# Altium PCB PCB_rockets_test_bench_acquisition.PcbDoc (part 2 of 2)
Units mm, origin at the board's own origin, x right, y up, seen from the top; angles counter-clockwise.
Board outline 99.82 x 99.85 mm, 4 copper layers (Top Layer, Int1 (GND), Int2 (PWR), Bottom Layer), stack 1.57 mm thick; 106 components, 96 nets, 381 pads, 73 vias.
Unrouted connection lines stored in the file: 46.
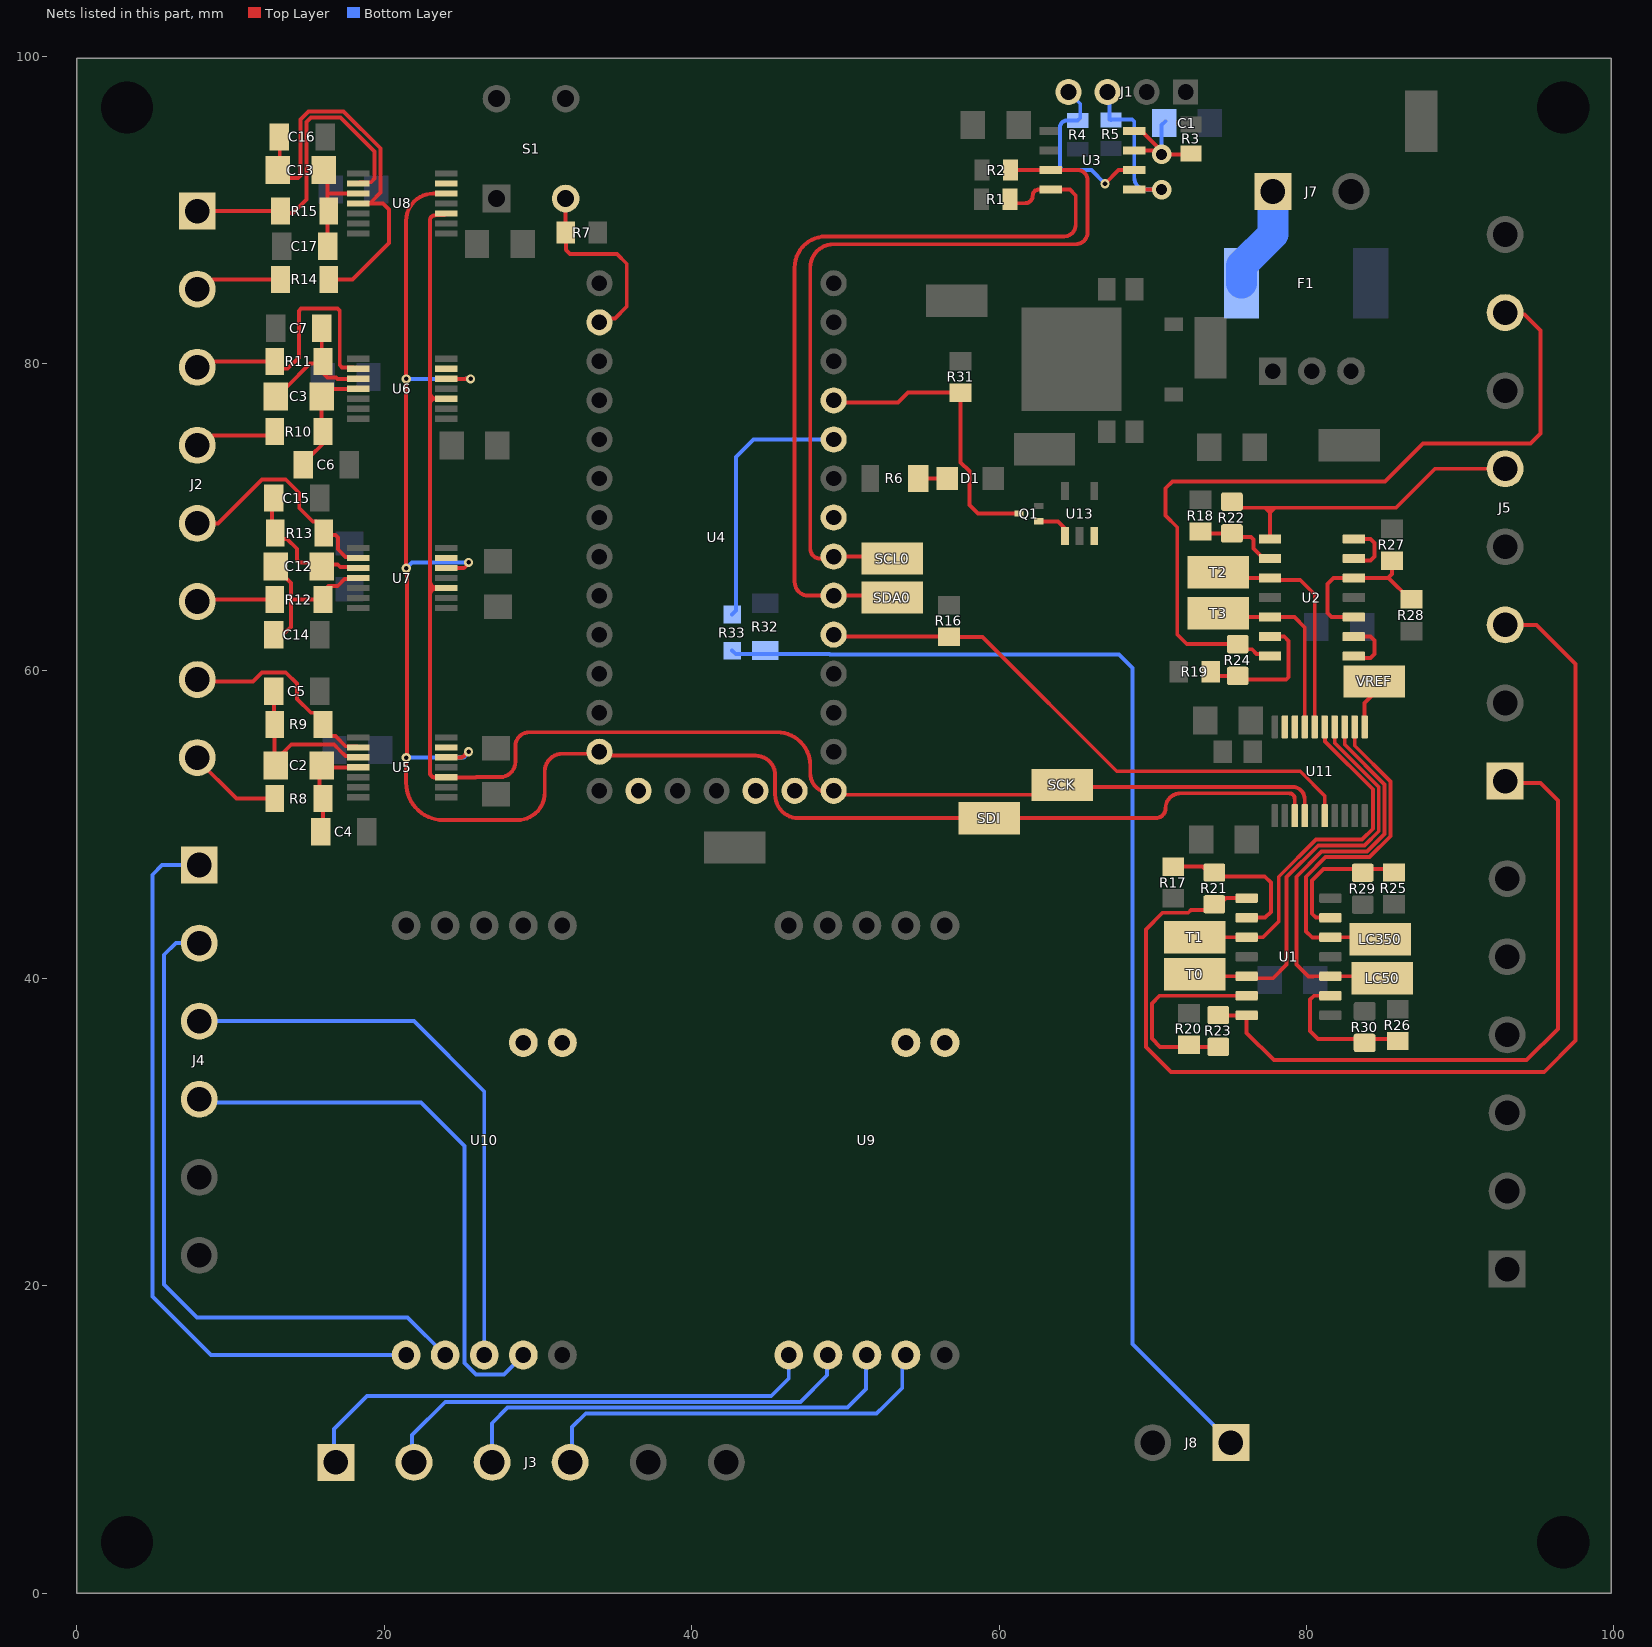
[diagram p4: the nets of this part, all layers, seen from the top]

## Via types
v1: diameter 0.6, hole 0.3, Top Layer to Bottom Layer, tented both sides, 33 vias
v2: diameter 0.6, hole 0.3, Top Layer to Bottom Layer, 16 vias
v3: diameter 0.9, hole 0.45, Top Layer to Bottom Layer, 13 vias
v4: diameter 0.9, hole 0.45, Top Layer to Bottom Layer, tented both sides, 7 vias
v5: diameter 1.27, hole 0.711, Top Layer to Bottom Layer, 4 vias

## Nets (pads, with @x,y where several pads share a name; then routed paths per layer and width w, separated by ;. In a path a pad name is that pad's centre, name@x,y a point inside that pad or via, vN(x,y) a via of type N, cw(c..) or ccw(c..) an arc to the next point about the centre after c; other vN are vias at no path point) (continued)
MOSI: SDI.1 U4.11 U5.12 U6.12 U7.12 U8.12 U11.13 | length 140.1
  Top Layer w0.254: U7.12@23.923,66.705 25.146,66.705 ; U5.12@24.034,54.371 24.956,54.371 ccw(c24.956,54.734) v2@25.319,54.734 ; U6.12@24.034,79.009 24.034,78.994 25.214,78.994 ; U8.12@24.034,91.059 23.201,91.059 ccw(c23.201,89.281) 21.423,89.281 v1(21.423,78.994) v1(21.423,66.675) 21.469,66.629 21.469,54.402 v1(21.423,54.356) 21.423,52.715 ; 24.956,54.371 ccw(c24.956,54.734) v2@25.319,54.734 ; 25.233,66.721 cw(c25.146,66.96) 25.146,66.706 ; v2(25.487,54.737) 25.322,54.737 v2@25.319,54.734 ; v2(25.487,67.056) 25.487,66.975 25.233,66.721 cw(c25.146,66.96) 25.146,66.706 ; v2(25.614,78.994) 25.406,78.994 v2@25.36,79.04 ; U11.13@79.234,50.582 79.234,51.667 ccw(c78.861,51.667) 78.861,52.04 71.812,52.04 ccw(c71.812,51.054) 70.826,51.054 ; 21.423,52.715 ccw(c23.846,52.715) 23.846,50.292 ; 21.423,52.715 ccw(c23.846,52.715) 23.846,50.292 ; 23.846,50.292 28.648,50.292 ; 25.214,78.994 ccw(c25.214,79.248) v2@25.36,79.04 ; 25.214,78.994 ccw(c25.214,79.248) v2@25.36,79.04 ; 28.648,50.292 ccw(c28.648,52.084) 30.44,52.084 ; 28.648,50.292 ccw(c28.648,52.084) 30.44,52.084 ; 30.44,52.084 30.44,53.467 ; 30.44,53.467 cw(c31.583,53.467) 31.583,54.61 ; 30.44,53.467 cw(c31.583,53.467) 31.583,54.61 ; 31.583,54.61 33.996,54.61 34.123,54.483 44.156,54.483 ; 44.156,54.483 cw(c44.156,53.213) 45.426,53.213 ; 44.156,54.483 cw(c44.156,53.213) 45.426,53.213 ; 45.426,51.943 ccw(c46.95,51.943) 46.95,50.419 ; 45.426,51.943 ccw(c46.95,51.943) 46.95,50.419 ; 45.426,51.943 45.426,53.213 ; 46.95,50.419 70.191,50.419 ; 70.191,50.419 ccw(c70.191,51.054) 70.826,51.054 ; 70.191,50.419 ccw(c70.191,51.054) 70.826,51.054
  Bottom Layer w0.254: v1(21.423,54.356) 25.065,54.356 ccw(c25.065,54.61) 25.319,54.61 25.446,54.737 v2(25.487,54.737) ; v1(21.423,78.994) v2@25.314,78.994 ; v2(25.487,67.056) 21.804,67.056 v1@21.469,66.721 ; v2(25.614,78.994) 25.406,78.994 v2@25.36,79.04 ; v1@21.469,66.721 ccw(c21.469,66.675) v1(21.423,66.675) cw(c21.469,66.675) v1@21.469,66.721 ; v2@25.314,78.994 ccw(c25.314,79.04) v2@25.36,79.04 ; v2@25.314,78.994 ccw(c25.314,79.04) v2@25.36,79.04
MSCK: SCK.1 U4.13 U5.10 U6.10 U7.10 U8.10 U11.14 | length 117.8
  Top Layer w0.254: 22.967,88.923 cw(c22.713,88.922) 22.967,88.92 ; 23.201,77.704 23.201,77.709 ; U8.10@23.819,89.641 ccw(c23.819,89.895) U8.10@24.034,89.759 ; U8.10@23.819,89.641 23.314,89.641 ccw(c23.314,89.293) 22.967,89.294 22.967,88.924 cw(c22.713,88.922) 22.967,88.92 ; U7.10@24.034,65.39 U7.10@23.432,65.39 ; U6.10@24.034,77.709 U6.10@23.363,77.709 ; 45.553,56.007 29.424,56.007 ; U11.14@79.884,50.582 79.884,51.648 ; 22.967,64.925 cw(c23.432,64.925) U7.10@23.432,65.39 ; 22.967,64.925 cw(c23.432,64.925) 22.967,64.928 cw(c23.432,64.925) U7.10@23.429,65.39 ; 22.967,64.924 22.967,65.431 ; 22.967,64.924 22.967,53.393 ccw(c23.289,53.393) 23.289,53.071 U5.10@24.034,53.071 25.911,53.071 ccw(c25.911,53.325) 25.994,53.085 cw(c26.101,52.776) 26.101,53.103 27.519,53.103 27.679,53.103 ccw(c27.679,53.357) 27.731,53.108 ccw(c27.519,54.102) 28.535,54.102 28.535,55.118 ; 22.967,65.431 22.967,65.855 ; 22.967,65.431 23.008,65.39 U7.10@23.432,65.39 ; 22.967,65.855 ccw(c23.433,65.855) U7.10@23.432,65.39 ; 22.967,65.855 ccw(c23.433,65.855) 22.967,65.852 ccw(c23.433,65.855) 23.351,65.397 ccw(c23.433,65.855) U7.10@23.429,65.39 ; 22.967,65.855 22.967,77.343 ; 22.967,77.343 cw(c23.333,77.343) U6.10@23.333,77.709 ; 22.967,77.343 cw(c23.333,77.343) 22.967,77.346 cw(c23.333,77.343) U6.10@23.333,77.709 ; 22.967,77.343 22.967,77.724 ; 22.967,77.724 22.967,78.105 ; 22.967,77.724 22.982,77.709 23.201,77.709 ; 22.967,78.105 ccw(c23.363,78.105) U6.10@23.363,77.709 ; 22.967,78.105 ccw(c23.363,78.105) 22.967,78.102 ccw(c23.363,78.105) 23.36,77.709 ccw(c23.363,78.105) U6.10@23.363,77.709 ; 22.967,78.105 22.967,88.92 ; 23.201,77.709 cw(c23.206,77.47) 23.206,77.709 ; 23.201,77.709 cw(c23.206,77.47) 23.206,77.709 ; 23.206,77.709 U6.10@23.333,77.709 ; U6.10@23.333,77.709 U6.10@23.363,77.709 ; U7.10@23.429,65.39 ccw(c23.433,65.855) U7.10@23.432,65.39 ; U7.10@23.429,65.39 cw(c23.432,64.925) U7.10@23.432,65.39 ; 28.535,55.118 cw(c29.424,55.118) 29.424,56.007 ; 28.535,55.118 cw(c29.424,55.118) 29.424,56.007 ; 47.712,53.34 ccw(c48.982,53.34) U4.13@48.982,52.07 ; 47.712,53.34 ccw(c48.982,53.34) U4.13@48.982,52.07 ; 47.712,53.34 47.712,53.848 ; 47.712,53.848 ccw(c45.553,53.848) 45.553,56.007 cw(c45.553,53.848) 47.712,53.848 ; U4.13@48.982,52.07 U4.13@49.236,52.07 ; U4.13@49.236,52.07 ccw(c49.363,52.07) U4.13@49.363,51.943 ; U4.13@49.236,52.07 ccw(c49.363,52.07) U4.13@49.363,51.943 ; U4.13@49.363,51.943 SCK.1@63.46,51.943 ; SCK.1@63.46,51.943 ccw(c63.46,52.578) SCK.1@64.095,52.578 ; SCK.1@63.46,51.943 ccw(c63.46,52.578) SCK.1@64.095,52.578 ; SCK.1@64.095,52.578 ccw(c64.222,52.578) SCK.1@64.222,52.451 ; SCK.1@64.095,52.578 ccw(c64.222,52.578) SCK.1@64.222,52.451 ; SCK.1@64.222,52.451 79.081,52.451 ; 79.081,52.451 cw(c79.081,51.648) 79.884,51.648 ; 79.081,52.451 cw(c79.081,51.648) 79.884,51.648
NetC1_2: C1.2 R3.1 U3.7 U3.8 | length 8.6
  Top Layer w0.254: U3.7@68.794,93.853 v5@70.528,93.853 ; U3.8@68.794,95.123 69.258,95.123 v5@70.528,93.853 ; R3.1@72.477,93.675 72.299,93.853 72.045,93.599 v5(70.572,93.599) 70.572,93.809 v5@70.528,93.853
  Bottom Layer w0.254: v5(70.572,93.599) 70.572,95.504 C1.2@70.826,95.758
NetC2_1: C2.1 C4.2 R8.2 U5.4 | length 6.8
  Top Layer w0.254: C4.2@15.864,49.911 16.013,50.06 16.013,51.943 15.797,52.159 15.797,53.975 16.051,53.721 U5.4@18.304,53.721
NetC2_2: C2.2 C5.1 R9.2 U5.3 | length 10.8
  Top Layer w0.254: C5.1@12.816,58.674 12.816,56.562 R9.2@12.863,56.515 12.863,54.128 13.947,55.212 14.867,55.212 16.727,55.212 17.104,54.835 17.104,54.826 17.481,54.449 18.226,54.449 U5.3@18.304,54.371
NetC3_1: C3.1 C6.2 R10.2 U6.4 | length 7.7
  Top Layer w0.254: C6.2@14.692,73.025 15.205,73.538 15.205,73.969 16.013,74.777 16.013,75.057 15.924,75.146 C3.1@15.924,77.331 ; C3.1@15.924,77.47 16.32,77.866 16.32,78.336 18.027,78.336 U6.4@18.05,78.359
NetC3_2: C3.2 C7.1 R11.2 U6.3 | length 8.4
  Top Layer w0.254: C3.2@12.952,77.47 13.62,78.138 13.62,78.43 15.176,79.986 15.862,79.986 R11.2@16.013,80.137 ; R11.2@15.933,80.137 C7.1@15.933,81.788 ; R11.2@16.013,79.375 16.3,79.088 16.854,79.088 16.948,78.994 18.289,78.994 U6.3@18.304,79.009
NetC12_1: C12.1 C14.2 R12.2 U7.4 | length 10.7
  Top Layer w0.254: C14.2@12.816,62.611 12.943,62.484 13.549,62.484 13.93,62.865 13.93,64.643 ; C12.1@12.825,66.814 13.93,65.709 13.93,64.77 13.93,64.643 ; R12.2@15.886,64.643 13.93,64.643 ; R12.2@15.886,64.77 15.886,65.05 16.364,65.528 16.974,65.528 17.413,65.967 18.104,65.967 U7.4@18.177,66.04
NetC12_2: C12.2 C15.1 R13.2 U7.3 | length 9
  Top Layer w0.254: C15.1@12.689,70.993 12.689,69.008 12.736,68.961 13.117,68.58 13.676,68.58 14.311,67.945 14.311,67.205 14.46,67.056 C12.2@15.797,67.056 ; C12.2@15.835,66.929 C12.2@15.962,66.929 ; C12.2@16.089,66.802 C12.2@15.962,66.929 ; U7.3@18.177,66.69 18.099,66.768 17.134,66.768 16.973,66.929 16.089,66.929 C12.2@15.962,66.929 ; C12.2@15.962,66.929 15.924,66.929 C12.2@15.962,66.929
NetC13_1: C13.1 C16.2 R14.2 U8.4 | length 26.4
  Top Layer w0.254: C16.2@13.197,93.98 13.197,92.075 13.197,91.957 13.315,92.075 14.399,92.075 14.548,92.224 14.548,95.868 15.073,96.393 17.359,96.393 19.752,94 19.752,91.112 19.127,90.487 ; R14.2@16.394,85.471 17.941,85.471 20.306,87.835 20.306,90.01 19.907,90.409 19.127,90.409 U8.4@18.46,90.409
NetC13_2: C13.2 C17.1 R15.2 U8.3 | length 6.3
  Top Layer w0.254: C13.2@16.305,91.821 16.305,91.059 ; C17.1@16.314,87.63 16.314,89.709 16.394,89.789 16.305,89.878 16.305,91.059 ; U8.3@18.304,91.059 16.305,91.059
NetD1_2: D1.2 R6.1 | length 2
  Top Layer w0.254: R6.1@54.993,72.517 D1.2@57.007,72.517
NetF1_2: F1.2 J7.1 | length 6.8
  Bottom Layer w2: F1.2@75.77,85.217 75.77,86.367 77.811,88.408 J7.1@77.811,91.186
NetJ2_1: J2.1 R15.1 U8.2 | length 21
  Top Layer w0.254: J2.1@7.834,89.916 R15.1@13.244,89.916 ; R15.1@13.244,89.789 14.057,89.789 14.946,90.678 14.946,91.521 14.929,91.538 14.929,95.71 15.231,96.012 17.145,96.012 19.371,93.786 19.371,92.031 19.127,91.787 18.382,91.787 U8.2@18.304,91.709
NetJ2_2: J2.2 R14.1 | length 5.7
  Top Layer w0.254: J2.2@7.834,84.836 8.196,84.836 8.831,85.471 R14.1@13.244,85.471
NetJ2_3: J2.3 R11.1 U6.2 | length 17.2
  Top Layer w0.254: J2.3@7.834,79.756 8.159,80.081 8.774,80.081 8.831,80.137 R11.1@12.863,80.137 ; R11.1@13.141,79.653 13.7,79.653 14.438,80.391 14.438,83.417 14.587,83.566 16.956,83.566 17.105,83.417 17.105,79.886 17.254,79.737 17.972,79.737 U6.2@18.05,79.659
NetJ2_4: J2.4 R10.1 | length 5.4
  Top Layer w0.254: J2.4@7.834,74.676 8.196,74.676 8.831,75.311 12.609,75.311 R10.1@12.863,75.565
NetJ2_5: J2.5 R13.1 U7.2 | length 14.8
  Top Layer w0.254: J2.5@7.834,69.596 9.178,69.596 12.041,72.459 13.591,72.459 14.469,71.581 14.469,70.597 15.347,69.719 15.586,69.719 16.064,69.241 R13.1@16.064,68.961 ; R13.1@16.064,68.834 16.829,68.834 16.978,68.685 16.978,67.915 17.475,67.418 18.099,67.418 U7.2@18.177,67.34
NetJ2_6: J2.6 R12.1 | length 5.1
  Top Layer w0.254: J2.6@7.834,64.516 7.961,64.643 R12.1@12.863,64.643
NetJ2_7: J2.7 R9.1 U5.2 | length 13.5
  Top Layer w0.254: J2.7@7.834,59.436 7.961,59.309 11.464,59.309 12.041,59.886 13.591,59.886 14.311,59.166 14.311,58.182 15.22,57.273 15.535,57.273 16.013,56.795 R9.1@16.013,56.515 ; R9.1@16.013,56.375 16.013,56.235 16.491,55.757 16.823,55.757 17.481,55.099 18.226,55.099 U5.2@18.304,55.021
NetJ2_8: J2.8 R8.1 | length 6.2
  Top Layer w0.254: J2.8@7.834,54.356 7.834,54.229 10.374,51.689 R8.1@12.863,51.689
NetJ3_1: J3.1 U9.1 | length 34.6
  Bottom Layer w0.254: J3.1@16.724,8.509 16.724,10.668 18.883,12.827 45.172,12.827 46.315,13.97 U9.1@46.315,15.494
NetJ3_2: J3.2 U9.2 | length 31.7
  Bottom Layer w0.254: J3.2@21.804,8.509 21.804,10.287 23.963,12.446 47.077,12.446 48.804,14.173 48.804,15.443 U9.2@48.855,15.494
NetJ3_3: J3.3 U9.3 | length 30
  Bottom Layer w0.254: J3.3@27.011,8.509 27.011,11.049 28.027,12.065 50.125,12.065 51.344,13.284 51.344,15.443 U9.3@51.395,15.494
NetJ3_4: J3.4 U9.4 | length 27.1
  Bottom Layer w0.254: J3.4@32.091,8.509 32.218,8.636 32.218,10.795 33.107,11.684 52.03,11.684 52.538,12.192 53.7,13.354 53.7,15.259 U9.4@53.935,15.494
NetJ4_1: J4.1 U10.1 | length 48.8
  Bottom Layer w0.254: J4.1@7.961,47.371 5.548,47.371 4.913,46.736 4.913,19.304 8.723,15.494 U10.1@21.423,15.494
NetJ4_2: J4.2 U10.2 | length 44.2
  Bottom Layer w0.254: J4.2@7.961,42.291 6.437,42.291 5.675,41.529 5.675,20.066 7.806,17.936 21.522,17.936 U10.2@23.963,15.494
NetJ4_3: J4.3 U10.3 | length 37.6
  Bottom Layer w0.254: J4.3@7.961,37.211 21.931,37.211 26.503,32.639 U10.3@26.503,15.494
NetJ4_4: J4.4 U10.4 | length 37.3
  Bottom Layer w0.254: J4.4@7.961,32.131 8.16,31.932 22.384,31.932 25.23,29.086 25.23,14.976 25.978,14.227 27.776,14.227 U10.4@29.043,15.494
NetJ8_1: J8.1 R32.2 R33.1 | length 79.6
  Bottom Layer w0.254: R33.1@42.632,61.318 42.863,61.087 48.966,61.087 48.979,61.074 67.791,61.074 68.667,60.198 68.667,16.195 J8.1@75.074,9.787
NetLC50_1: LC50.1 U1.10 U11.3 | length 26.5
  Top Layer w0.254: U11.3@82.484,56.352 82.484,55.206 85.078,52.612 85.078,49.4 83.938,48.26 80.986,48.26 79.335,46.609 79.335,40.894 80.119,40.11 80.424,40.11 80.446,40.132 U1.10@81.552,40.132 LC50.1@83.78,40.132 ; LC50.1@84.034,40.132 LC50.1@84.796,39.37
NetLC350_1: LC350.1 U1.12 U11.2 | length 23
  Top Layer w0.254: U11.2@83.134,56.352 83.134,55.129 85.459,52.804 85.459,49.242 84.096,47.879 81.24,47.879 79.97,46.609 79.97,43.053 80.373,42.65 81.53,42.65 U1.12@81.552,42.672 84.415,42.672 LC350.1@84.542,42.545
NetQ1_2: Q1.2 U13.1 | length 2.4
  Top Layer w0.254: Q1.2@62.581,69.731 63.833,69.731 64.288,69.276 U13.1@64.288,68.764
NetR16_1: R16.1 U4.17 U11.16 | length 37.5
  Top Layer w0.254: U4.17@49.236,62.23 56.71,62.23 R16.1@56.729,62.211 58.907,62.211 67.651,53.467 79.589,53.467 81.184,51.872 U11.16@81.184,50.582
NetR17_2: R17.2 R21.1 U1.2 | length 10.3
  Top Layer w0.254: R17.2@71.461,47.263 73.244,47.263 73.879,46.628 77.284,46.628 77.684,46.228 77.684,44.323 77.303,43.942 U1.2@76.102,43.942
NetR18_2: R18.2 R22.1 U2.2 | length 5.6
  Top Layer w0.254: R18.2@73.112,69.069 73.239,68.942 R22.1@75.144,68.942 75.379,68.707 76.392,68.707 76.541,68.558 76.541,67.97 77.201,67.31 U2.2@77.626,67.31
NetR19_2: R19.2 R24.1 U2.6 | length 8.7
  Top Layer w0.254: R19.2@73.893,59.944 74.166,59.671 R24.1@75.525,59.671 ; R24.1@75.525,59.29 R24.1@75.544,59.309 ; R24.1@75.67,59.436 78.678,59.436 78.827,59.585 78.827,61.954 78.551,62.23 U2.6@77.626,62.23
NetR20_2: R20.2 R23.1 U1.6 | length 12.7
  Top Layer w0.254: R23.1@73.747,35.541 71.842,35.541 70.467,35.541 69.937,36.071 69.937,38.354 70.445,38.862 U1.6@76.102,38.862
NetR25_2: R25.2 R29.1 U1.13 | length 9.2
  Top Layer w0.254: U1.13@81.552,43.942 80.605,43.942 80.351,44.196 80.351,46.355 81.113,47.117 85.45,47.117 R25.2@85.685,46.882 R25.2@85.666,46.863
NetR26_2: R26.2 R30.1 U1.9 | length 9.5
  Top Layer w0.254: U1.9@81.552,38.862 80.478,38.862 80.224,38.608 80.224,36.576 80.751,36.049 R30.1@83.428,36.049 ; R30.1@83.526,36.049 R30.1@83.428,36.049 ; R26.2@85.939,36.049 83.78,36.049 R30.1@83.428,36.049
NetR27_1: R27.1 R28.2 U2.10 U2.12 | length 11.1
  Top Layer w0.254: U2.10@83.076,63.5 81.621,63.5 81.367,63.754 81.367,65.659 81.748,66.04 U2.12@83.076,66.04 85.304,66.04 ; R27.1@85.558,67.164 85.558,66.294 85.304,66.04 ; R28.2@86.828,64.662 86.718,64.662 85.34,66.04 85.304,66.04
NetT0_1: T0.1 U1.5 U11.4 | length 27
  Top Layer w0.254: T0.1@73.112,40.259 73.239,40.132 U1.5@76.102,40.132 76.229,40.005 77.811,40.005 78.7,40.894 78.7,46.578 80.763,48.641 83.769,48.641 84.697,49.569 84.697,52.454 81.834,55.317 U11.4@81.834,56.352
NetT1_1: T1.1 U1.3 U11.5 | length 23.8
  Top Layer w0.254: T1.1@73.112,42.545 73.239,42.672 U1.3@76.102,42.672 77.176,42.672 78.192,43.688 78.192,46.609 80.605,49.022 83.611,49.022 84.316,49.727 84.316,52.296 81.2,55.412 81.2,56.336 U11.5@81.184,56.352
NetT2_1: T2.1 U2.3 U11.6 | length 15.5
  Top Layer w0.254: T2.1@74.255,66.421 74.636,66.04 U2.3@77.626,66.04 77.753,65.913 79.589,65.913 80.534,64.968 U11.6@80.534,56.352
NetT3_1: T3.1 U2.5 U11.7 | length 12.3
  Top Layer w0.254: T3.1@74.382,63.627 74.509,63.5 U2.5@77.626,63.5 79.208,63.5 79.884,62.824 U11.7@79.884,56.352
NetU2_8: U2.8 U2.9 | length 3.8
  Top Layer w0.254: U2.8@83.076,60.96 83.203,60.833 84.161,60.833 84.415,61.087 84.415,61.976 84.161,62.23 U2.9@83.076,62.23
NetU2_13: U2.13 U2.14 | length 3.8
  Top Layer w0.254: U2.13@83.076,67.31 83.203,67.183 84.161,67.183 84.415,67.437 84.415,68.326 84.161,68.58 U2.14@83.076,68.58
NetU4_20: U4.20
NetU4_On_Off: U4.On_Off
NetU4_Program: U4.Program
NetU4_VBAT: U4.VBAT
NetU5_13: U5.13
NetU6_13: U6.13
NetU7_13: U7.13
NetU8_13: U8.13
NetU9_11: U9.11
NetU9_12: U9.12
NetU10_11: U10.11
NetU10_12: U10.12
NetU11_1: U11.1 VREF.1 | length 2.5
  Top Layer w0.254: U11.1@83.784,56.352 83.784,57.916 VREF.1@84.415,58.547
NetU11_8: U11.8
NetU11_9: U11.9
NetU13_3: U13.3
PRESSURE: R33.2 U4.22 | length 17.2
  Bottom Layer w0.254: R33.2@42.632,63.668 42.886,63.922 42.886,73.914 44.029,75.057 U4.22@49.236,75.057
PSH_BTN: R7.1 S1.3 U4.0 | length 12.7
  Top Layer w0.254: S1.3@31.801,90.73 31.801,88.536 R7.1@31.818,88.519 31.818,87.395 32.091,87.122 35.139,87.122 35.774,86.487 35.774,83.693 35.001,82.92 34.239,82.92 U4.0@33.996,82.677
SCL0_3v3: R2.1 SCL0.1 U3.3 U4.19 | length 57.8
  Top Layer w0.254: U4.19@49.236,67.31 48.347,67.31 ; U4.19@49.236,67.437 52.919,67.437 SCL0.1@53.046,67.31 ; R2.1@60.748,92.583 U3.3@63.346,92.583 65.111,92.583 ; 47.712,67.945 ccw(c48.347,67.945) 48.347,67.31 ; 47.712,67.945 ccw(c48.347,67.945) 48.347,67.31 ; 47.712,67.945 47.712,86.233 ; 47.712,86.233 cw(c49.236,86.233) 49.236,87.757 ; 47.712,86.233 cw(c49.236,86.233) 49.236,87.757 ; 49.236,87.757 64.984,87.757 ; 64.984,87.757 ccw(c64.984,88.519) 65.746,88.519 ; 64.984,87.757 ccw(c64.984,88.519) 65.746,88.519 ; 65.111,92.583 cw(c65.111,91.948) 65.746,91.948 ; 65.111,92.583 cw(c65.111,91.948) 65.746,91.948 ; 65.746,88.519 65.746,91.948
SCL0_5v: J1.04 R4.1 U3.6 | length 12.4
  Top Layer w0.254: v1(66.889,91.694) 67.778,92.583 U3.6@68.794,92.583
  Bottom Layer w0.254: J1.04@64.476,98.171 64.476,97.697 65.278,96.895 65.278,95.966 R4.1@65.111,95.799 64.388,95.799 ccw(c64.388,95.379) 63.968,95.379 63.968,92.837 ccw(c64.222,92.837) 64.222,92.583 66,92.583 v1(66.889,91.694)
SDA0_3v3: R1.1 SDA0.1 U3.4 U4.18 | length 61.8
  Top Layer w0.254: SDA0.1@53.046,64.77 52.919,64.897 U4.18@49.236,64.897 47.585,64.897 ; 46.696,65.786 ccw(c47.585,65.786) 47.585,64.897 ; 46.696,65.786 ccw(c47.585,65.786) 47.585,64.897 ; 46.696,65.786 46.696,86.233 ; 46.696,86.233 cw(c48.728,86.233) 48.728,88.265 ; 46.696,86.233 cw(c48.728,86.233) 48.728,88.265 ; 48.728,88.265 64.222,88.265 ; R1.1@60.961,90.424 cw(c60.961,90.678) R1.1@60.707,90.678 ccw(c60.961,90.678) R1.1@60.961,90.424 ; R1.1@60.961,90.424 61.682,90.424 ; 61.682,90.424 ccw(c61.682,90.932) 62.19,90.932 ; 61.682,90.424 ccw(c61.682,90.932) 62.19,90.932 ; 62.19,90.932 cw(c62.571,90.932) 62.571,91.313 ; 62.19,90.932 cw(c62.571,90.932) 62.571,91.313 ; 62.571,91.313 U3.4@63.346,91.313 64.603,91.313 64.984,90.932 64.984,89.027 ; 64.222,88.265 ccw(c64.222,89.027) 64.984,89.027 ; 64.222,88.265 ccw(c64.222,89.027) 64.984,89.027
SDA0_5v: J1.03 R5.1 U3.5 | length 11.2
  Top Layer w0.254: U3.5@68.794,91.313 v5(70.572,91.313)
  Bottom Layer w0.254: J1.03@67.056,97.663 67.183,97.536 67.183,95.927 R5.1@67.27,95.84 ; R5.1@67.183,95.885 68.645,95.885 68.794,95.736 68.794,92.075 ccw(c69.556,92.075) 69.556,91.313 v5(70.572,91.313)
T0_OUT: J5.1 R23.2 U1.7 | length 43.6
  Top Layer w0.254: R23.2@74.255,37.592 U1.7@76.102,37.592 76.102,36.449 77.88,34.671 94.321,34.671 96.353,36.703 96.353,51.562 95.21,52.705 93.051,52.705 J5.1@92.924,52.832
T1_OUT: J5.3 R21.2 U1.1 | length 74.6
  Top Layer w0.254: U1.1@76.102,45.212 74.777,45.212 74.015,44.45 72.49,44.45 72.306,44.266 70.642,44.266 69.556,43.18 69.556,35.532 71.179,33.909 95.464,33.909 97.496,35.941 97.496,60.452 94.956,62.992 J5.3@92.924,62.992
T2_OUT: J5.5 R22.2 U2.1 | length 21.9
  Top Layer w0.254: R22.2@75.144,71.012 75.544,70.612 77.303,70.612 ; U2.1@77.626,68.58 77.626,70.289 ; J5.5@92.924,73.152 88.352,73.152 85.812,70.612 77.949,70.612 ; 77.303,70.612 77.626,70.612 ; 77.303,70.612 77.626,70.289 ; 77.626,70.289 77.626,70.612 ; 77.626,70.289 77.949,70.612 ; 77.626,70.612 77.949,70.612
T3_OUT: J5.7 R24.2 U2.7 | length 52.1
  Top Layer w0.254: R24.2@75.11,61.405 76.442,61.405 76.744,61.104 77.482,61.104 U2.7@77.626,60.96 ; R24.2@75.525,61.741 72.204,61.741 71.588,62.357 71.588,69.342 70.826,70.104 70.826,71.882 71.271,72.326 85.114,72.326 87.59,74.803 94.575,74.803 95.21,75.438 95.21,82.157 94.182,83.185 93.051,83.185 J5.7@92.924,83.312
Voltage_Warning: Q1.1 R31.1 U4.23 | length 19.5
  Top Layer w0.254: U4.23@49.236,77.47 53.427,77.47 54.062,78.105 57.472,78.105 R31.1@57.491,78.086 57.491,73.564 58.063,72.993 58.063,70.802 58.634,70.231 Q1.1@61.291,70.231
pads on no net: S1.2 S1.4 U4.15@49.236,57.277 U5.6 U6.6 U7.6 U8.6

## Polygon pours and split planes (outlines as drawn)
no net on Drill Guide "NONET_L-01_P-001" (solid): -11.303,107.442
GND on Top Layer "GND_L01_P002" (solid, pour order 2): 0.635,45.212 0.762,45.085 19.685,45.085 20.534,45.934 20.534,100.417 23.876,103.759 102.362,103.759 105.791,100.33 105.791,-6.35 -1.016,-6.35 -8.255,0.889 -5.588,3.556 -5.588,44.704
no net on Top Layer "NONET_L01_P001" (solid, pour order 1): 12.065,93.345
GND on Bottom Layer "GND_L04_P003" (solid, pour order 3): 19.685,45.085 20.574,45.974 20.574,100.33 24.384,104.14 105.537,104.14 105.537,-4.318 99.187,-10.668 -4.318,-10.668 -4.318,43.053 -2.286,45.085
GND on Int1 (GND) (split plane): 99.312,0.51 0.51,0.51 0.51,99.338 99.312,99.338
3.3VD on Int2 (PWR) (split plane): 65.998,89.081 64.93,88.013 48.982,88.013 48.932,88.004 48.89,87.976 47.366,86.452 47.338,86.41 47.329,86.36 47.329,83.82 47.338,83.77 47.366,83.728 48.509,82.585 48.551,82.557 48.601,82.548 56.929,82.548 58.378,81.099 58.378,74.803 58.387,74.753 58.415,74.711 63.749,69.377 63.791,69.349 63.841,69.34 75.598,69.34 77.174,67.764 77.174,50.346 72.931,46.103 49.109,46.103 49.059,46.094 49.017,46.066 47.62,44.669 47.592,44.627 47.583,44.577 47.583,42.472 47.277,42.166 38.622,42.166 35.612,45.177 35.57,45.205 35.52,45.214 23.201,45.214 23.151,45.205 23.109,45.177 22.728,44.796 22.7,44.754 22.691,44.704 22.691,39.88 21.223,39.88 20.028,41.075 20.028,46.555 21.896,48.422 21.924,48.464 21.933,48.514 21.933,99.338 65.998,99.338
5V on Int2 (PWR) (split plane): 99.312,78.107 81.167,78.107 78.665,80.61 78.623,80.638 78.573,80.647 67.905,80.647 67.855,80.638 67.813,80.61 64.511,77.308 64.483,77.266 64.474,77.216 64.474,74.549 64.483,74.499 64.511,74.457 65.4,73.568 65.442,73.54 65.492,73.531 82.456,73.531 85.937,70.05 85.937,51.616 74.201,39.88 22.949,39.88 22.949,44.65 23.255,44.956 35.466,44.956 38.476,41.945 38.518,41.917 38.568,41.908 47.331,41.908 47.381,41.917 47.423,41.945 47.804,42.326 47.832,42.368 47.841,42.418 47.841,44.523 49.163,45.845 72.985,45.845 73.035,45.854 73.077,45.882 77.395,50.2 77.423,50.242 77.432,50.292 77.432,67.818 77.423,67.868 77.395,67.91 75.744,69.561 75.702,69.589 75.652,69.598 63.895,69.598 58.636,74.857 58.636,81.153 58.627,81.203 58.599,81.245 57.075,82.769 57.033,82.797 56.983,82.806 48.655,82.806 47.587,83.874 47.587,86.306 49.036,87.755 64.984,87.755 65.034,87.764 65.076,87.792 66.219,88.935 66.247,88.977 66.256,89.027 66.256,99.338 99.312,99.338
3.3VA on Int2 (PWR) (split plane): 21.675,48.568 19.807,46.701 19.779,46.659 19.77,46.609 19.77,41.021 19.779,40.971 19.807,40.929 21.077,39.659 21.119,39.631 21.169,39.622 74.255,39.622 74.305,39.631 74.347,39.659 86.158,51.47 86.186,51.512 86.195,51.562 86.195,70.104 86.186,70.154 86.158,70.196 82.602,73.752 82.56,73.78 82.51,73.789 65.546,73.789 64.732,74.603 64.732,77.162 67.959,80.389 78.519,80.389 81.021,77.886 81.063,77.858 81.113,77.849 99.312,77.849 99.312,0.51 0.51,0.51 0.51,99.338 21.675,99.338

## Keep-outs
Keep-Out Layer:
  the board outline again, w0.15

## Other copper
Int1 (GND) (plane layer: these items are gaps in the copper):
  lines w0.6: 13.93,46.101 13.93,47.879 12.406,49.403 12.406,93.218 14.184,94.996 15.073,94.996 18.883,94.996 20.407,93.472 20.407,92.202 20.407,49.53 18.883,48.006 18.883,45.974
Int2 (PWR) (plane layer: these items are gaps in the copper):
  lines w0.254: 19.899,100.076 21.804,100.076 21.804,48.514 19.899,46.609 19.899,41.021 21.169,39.751 74.255,39.751 86.066,51.562 86.066,70.104 82.51,73.66 65.492,73.66 64.603,74.549 64.603,77.216 67.905,80.518 68.921,80.518 78.573,80.518 81.113,77.978 98.639,77.978 100.036,77.978 ; 22.82,39.751 22.82,44.704 23.201,45.085 35.317,45.085 35.52,45.085 38.568,42.037 47.331,42.037 47.712,42.418 47.712,44.577 49.109,45.974 72.985,45.974 77.303,50.292 77.303,67.818 75.652,69.469 63.841,69.469 58.507,74.803 58.507,81.153 56.983,82.677 48.601,82.677 47.458,83.82 47.458,86.36 48.982,87.884 64.984,87.884 66.127,89.027 66.127,99.949 67.651,99.949

## Silkscreen, mask and mechanical layers (free items; w line width, h text height)
Top Overlay:
  lines w0.15: 1.738,21.463 1.738,21.971 ; 1.992,21.336 1.992,22.098 ; 2.246,21.209 2.246,22.225 ; 2.246,21.717 2.754,21.717 ; 42.759,3.302 43.775,3.302 ; 42.886,3.048 43.648,3.048 ; 43.013,2.794 43.521,2.794 ; 43.267,3.302 43.267,3.81 ; 97.242,88.138 97.75,88.138 ; 97.369,78.232 97.877,78.232 ; 97.496,58.039 98.004,58.039 ; 97.496,68.072 98.004,68.072 ; 97.623,20.955 98.131,20.955 ; 97.623,41.275 98.131,41.275 ; 97.75,26.289 98.258,26.289 ; 97.75,31.242 98.258,31.242 ; 97.75,87.63 97.75,88.646 ; 97.877,77.724 97.877,78.74 ; 98.004,57.531 98.004,58.547 ; 98.004,67.564 98.004,68.58 ; 98.004,87.757 98.004,88.519 ; 98.131,20.447 98.131,21.463 ; 98.131,40.767 98.131,41.783 ; 98.131,77.851 98.131,78.613 ; 98.258,25.781 98.258,26.797 ; 98.258,30.734 98.258,31.75 ; 98.258,57.658 98.258,58.42 ; 98.258,67.691 98.258,68.453 ; 98.258,87.884 98.258,88.392 ; 98.385,20.574 98.385,21.336 ; 98.385,40.894 98.385,41.656 ; 98.385,77.978 98.385,78.486 ; 98.512,25.908 98.512,26.67 ; 98.512,30.861 98.512,31.623 ; 98.512,57.785 98.512,58.293 ; 98.512,67.818 98.512,68.326 ; 98.639,20.701 98.639,21.209 ; 98.639,41.021 98.639,41.529 ; 98.766,26.035 98.766,26.543 ; 98.766,30.988 98.766,31.496
  lines w0.203: 80.605,29.464 87.59,29.464 ; 80.478,25.527 87.717,25.527 87.717,31.496 80.478,31.496 80.478,25.527
  text "12V" at 78.7,98.425 h1 r180
  text "GND" at 84.415,98.298 h1 r180
  text "T3-" at 1.865,91.44 h1 r270
  text "T3+" at 1.865,86.868 h1 r270
  text "T3" at 98.766,82.423 h1 r90
  text "T2-" at 1.865,81.534 h1 r270
  text "T2+" at 1.865,76.581 h1 r270
  text "T2" at 98.766,72.136 h1 r90
  text "T1-" at 1.865,71.501 h1 r270
  text "T1+" at 1.865,66.548 h1 r270
  text "T1" at 98.766,62.357 h1 r90
  text "T0-" at 1.865,61.214 h1 r270
  text "T0+" at 1.865,55.88 h1 r270
  text "T0" at 98.766,51.689 h1 r90
  text "RED" at 1.738,48.768 h1 r270
  text "3V3" at 21.423,45.571 h1 r45
  text "5V" at 23.963,45.571 h1 r45
  text "DATA" at 26.503,45.571 h1 r45
  text "CLK" at 29.043,45.571 h1 r45
  text "GND" at 31.583,45.571 h1 r45
  text "3V3" at 46.293,45.351 h1 r45
  text "5V" at 48.833,45.351 h1 r45
  text "DATA" at 51.373,45.351 h1 r45
  text "CLK" at 53.913,45.351 h1 r45
  text "GND" at 56.453,45.351 h1 r45
  text "BLCK" at 1.738,44.069 h1 r270
  text "LC_350" at 98.726,43.18 h1 r90
  text "WHTE" at 1.738,38.481 h1 r270
  text "LC_50" at 98.853,33.909 h1 r90
  text "GRN" at 1.611,33.655 h1 r270
  text "TP" at 80.478,29.718 h1.02
  text "YLW" at 1.738,28.829 h1 r270
  text "350 Kg" at 3.897,17.018 h1.52
  text "Équipe Rhino" at 79.208,14.757 h3
  text "ELE-400" at 79.208,12.098 h3
  text "Pour ROCKETS" at 79.208,9.812 h3
  text "10 Juillet 2021" at 79.271,7.416 h3
  text "50 Kg" at 46.315,7.239 h1.52
  text "RED" at 16.216,2.794 h1
  text "BLCK" at 20.915,2.794 h1
  text "WHTE" at 26.503,2.794 h1
  text "YLW" at 36.155,2.794 h1
  text "GND" at 68.216,2.802 h1
  text "GRN" at 31.329,2.667 h1
  text "+" at 75.074,2.636 h1
Mechanical 4:
  drawing of 441 lines, arcs and shapes, not listed
  text "Layer" at 105.043,98.157 h1.52
  text "Name" at 115.455,98.157 h1.52
  text "Material" at 139.071,98.157 h1.52
  text "Thickness" at 154.307,98.157 h1.52
  text "Constant" at 170.813,98.157 h1.52
  text "Board Layer Stack" at 185.287,98.157 h1.52
  text "Top Overlay" at 115.455,95.109 h1.52
  text "Top Solder" at 115.455,92.061 h1.52
  text "SM-001" at 139.071,92.061 h1.52
  text "0,59mil" at 154.307,92.061 h1.52
  text "3,8" at 170.813,92.061 h1.52
  text "1" at 105.043,89.013 h1.52
  text "Top Layer" at 115.455,89.013 h1.52
  text "Copper" at 139.071,89.013 h1.52
  text "1,38mil" at 154.307,89.013 h1.52
  text "Dielectric 1" at 115.455,85.965 h1.52
  text "PP-017" at 139.071,85.965 h1.52
  text "7,87mil" at 154.307,85.965 h1.52
  text "4,6" at 170.813,85.965 h1.52
  text "2" at 105.043,82.917 h1.52
  text "Int1 (GND)" at 115.455,82.917 h1.52
  text "Copper" at 139.071,82.917 h1.52
  text "0,69mil" at 154.307,82.917 h1.52
  text "Dielectric 3" at 115.455,79.869 h1.52
  text "Core-039" at 139.071,79.869 h1.52
  text "41,93mil" at 154.307,79.869 h1.52
  text "4,5" at 170.813,79.869 h1.52
  text "3" at 105.043,76.821 h1.52
  text "Int2 (PWR)" at 115.455,76.821 h1.52
  text "Copper" at 139.071,76.821 h1.52
  text "0,69mil" at 154.307,76.821 h1.52
  text "Dielectric 5" at 115.455,73.773 h1.52
  text "PP-017" at 139.071,73.773 h1.52
  text "7,87mil" at 154.307,73.773 h1.52
  text "4,6" at 170.813,73.773 h1.52
  text "4" at 105.043,70.725 h1.52
  text "Bottom Layer" at 115.455,70.725 h1.52
  text "Copper" at 139.071,70.725 h1.52
  text "1,38mil" at 154.307,70.725 h1.52
  text "Bottom Solder" at 115.455,67.677 h1.52
  text "SM-001" at 139.071,67.677 h1.52
  text "0,59mil" at 154.307,67.677 h1.52
  text "3,8" at 170.813,67.677 h1.52
  text "Bottom Overlay" at 115.455,64.629 h1.52
Mechanical 13:
  the board outline again, w0.15
Drill Drawing:
  circle w0.254: c225.949,37.232 r0.508
  circle w0.254: c225.949,37.232 r0.847
  circle w0.254: c225.949,14.372 r0.847
  lines w0.254: 225.102,5.905 226.796,5.905 226.796,7.599 225.102,7.599 225.102,5.905 ; 225.102,10.139 225.526,10.139 225.526,9.716 226.372,9.716 226.372,10.139 226.796,10.139 226.796,10.985 226.372,10.985 226.372,11.409 225.526,11.409 225.526,10.985 225.102,10.985 225.102,10.139 ; 225.102,17.335 225.949,17.759 226.796,17.335 226.372,18.182 226.796,19.029 225.949,18.605 225.102,19.029 225.526,18.182 225.102,17.335 ; 225.102,21.992 225.949,21.145 226.796,21.992 225.949,22.839 225.102,21.992 ; 225.102,24.956 225.102,25.379 225.526,25.802 225.102,26.225 225.102,26.649 225.526,26.649 225.949,26.225 226.372,26.649 226.796,26.649 226.796,26.225 226.372,25.802 226.796,25.379 226.796,24.956 226.372,24.956 225.949,25.379 225.526,24.956 225.102,24.956 ; 225.102,30.459 226.796,30.459 225.949,28.765 225.102,30.459 ; 225.102,32.999 225.526,32.999 225.949,32.575 226.372,32.999 226.796,32.999 226.372,33.422 226.796,33.845 226.372,33.845 225.949,34.269 225.526,33.845 225.102,33.845 225.526,33.422 225.102,32.999 ; 225.441,6.244 226.457,6.244 226.457,7.26 225.441,7.26 225.441,6.244
  lines w0.381: 223.583,4.763 492.85,4.763 ; 223.583,39.052 492.85,39.052 ; 237.576,0.953 237.576,42.862 ; 252.558,0.953 252.558,42.862 ; 282.267,0.953 282.267,42.862 ; 295.116,0.953 295.116,42.862 ; 313.755,0.953 313.755,42.862 ; 351.843,0.953 351.843,42.862 ; 366.826,0.953 366.826,42.862 ; 385.769,0.953 385.769,42.862 ; 402.275,0.953 402.275,42.862 ; 423.96,0.953 423.96,42.862 ; 457.834,0.953 457.834,42.862 ; 223.583,0.953 492.85,0.953 492.85,42.862 223.583,42.862 223.583,0.953
  text "Symbol" at 225.869,40.195 h1.83
  text "Count" at 238.719,40.195 h1.83
  text "Hole Size" at 253.701,40.195 h1.83
  text "Plated" at 283.41,40.195 h1.83
  text "Hole Type" at 296.259,40.195 h1.83
  text "Drill Layer Pair" at 314.898,40.195 h1.83
  text "Via/Pad" at 352.986,40.195 h1.83
  text "Pad Shape" at 367.969,40.195 h1.83
  text "Template" at 386.912,40.195 h1.83
  text "Description" at 403.418,40.195 h1.83
  text "Hole Tolerance (+)" at 425.103,40.195 h1.83
  text "Hole Tolerance (-)" at 458.977,40.195 h1.83
  text "4" at 238.719,36.386 h1.52
  text "0,711mm (28,00mil)" at 253.701,36.386 h1.52
  text "PTH" at 283.41,36.386 h1.52
  text "Round" at 296.259,36.386 h1.52
  text "Top Layer - Bottom Layer" at 314.898,36.386 h1.52
  text "Via" at 352.986,36.386 h1.52
  text "Rounded" at 367.969,36.386 h1.52
  text "v127h71" at 386.912,36.386 h1.52
  text "4" at 238.719,32.575 h1.52
  text "1,020mm (40,16mil)" at 253.701,32.575 h1.52
  text "PTH" at 283.41,32.575 h1.52
  text "Round" at 296.259,32.575 h1.52
  text "Top Layer - Bottom Layer" at 314.898,32.575 h1.52
  text "Pad" at 352.986,32.575 h1.52
  text "(Mixed)" at 367.969,32.575 h1.52
  text "(Mixed)" at 386.912,32.575 h1.52
  text "4" at 238.719,28.765 h1.52
  text "1,100mm (43,31mil)" at 253.701,28.765 h1.52
  text "PTH" at 283.41,28.765 h1.52
  text "Round" at 296.259,28.765 h1.52
  text "Top Layer - Bottom Layer" at 314.898,28.765 h1.52
  text "Pad" at 352.986,28.765 h1.52
  text "(Mixed)" at 367.969,28.765 h1.52
  text "(Mixed)" at 386.912,28.765 h1.52
  text "4" at 238.719,24.956 h1.52
  text "3,400mm (133,86mil)" at 253.701,24.956 h1.52
  text "NPTH" at 283.41,24.956 h1.52
  text "Round" at 296.259,24.956 h1.52
  text "Top Layer - Bottom Layer" at 314.898,24.956 h1.52
  text "Pad" at 352.986,24.956 h1.52
  text "Rounded" at 367.969,24.956 h1.52
  text "c152hn340" at 386.912,24.956 h1.52
  text "20" at 238.719,21.145 h1.52
  text "0,450mm (17,72mil)" at 253.701,21.145 h1.52
  text "PTH" at 283.41,21.145 h1.52
  text "Round" at 296.259,21.145 h1.52
  text "Top Layer - Bottom Layer" at 314.898,21.145 h1.52
  text "Via" at 352.986,21.145 h1.52
  text "Rounded" at 367.969,21.145 h1.52
  text "(Mixed)" at 386.912,21.145 h1.52
  text "24" at 238.719,17.335 h1.52
  text "1,016mm (40,00mil)" at 253.701,17.335 h1.52
  text "PTH" at 283.41,17.335 h1.52
  text "Round" at 296.259,17.335 h1.52
  text "Top Layer - Bottom Layer" at 314.898,17.335 h1.52
  text "Pad" at 352.986,17.335 h1.52
  text "Rounded" at 367.969,17.335 h1.52
  text "c188h102" at 386.912,17.335 h1.52
  text "36" at 238.719,13.525 h1.52
  text "1,000mm (39,37mil)" at 253.701,13.525 h1.52
  text "PTH" at 283.41,13.525 h1.52
  text "Round" at 296.259,13.525 h1.52
  text "Top Layer - Bottom Layer" at 314.898,13.525 h1.52
  text "Pad" at 352.986,13.525 h1.52
  text "(Mixed)" at 367.969,13.525 h1.52
  text "(Mixed)" at 386.912,13.525 h1.52
  text "38" at 238.719,9.716 h1.52
  text "1,600mm (62,99mil)" at 253.701,9.716 h1.52
  text "PTH" at 283.41,9.716 h1.52
  text "Round" at 296.259,9.716 h1.52
  text "Top Layer - Bottom Layer" at 314.898,9.716 h1.52
  text "Pad" at 352.986,9.716 h1.52
  text "(Mixed)" at 367.969,9.716 h1.52
  text "(Mixed)" at 386.912,9.716 h1.52
  text "49" at 238.719,5.905 h1.52
  text "0,300mm (11,81mil)" at 253.701,5.905 h1.52
  text "PTH" at 283.41,5.905 h1.52
  text "Round" at 296.259,5.905 h1.52
  text "Top Layer - Bottom Layer" at 314.898,5.905 h1.52
  text "Via" at 352.986,5.905 h1.52
  text "Rounded" at 367.969,5.905 h1.52
  text "(Mixed)" at 386.912,5.905 h1.52
  text "183 Total" at 238.719,2.095 h1.52

## Text inside footprints (layer, text, board x,y; h text height)
C25: Top Overlay "+" at 70.064,84.137 h0.38 r180
C26: Top Overlay "+" at 70.064,74.866 h0.38 r180
U3: Mechanical 7 "Default Padstyle: RX57p5Y21D0T" at 56.545,85.636 h1.27; Mechanical 7 "Pin One Padstyle: RX57p5Y21D0T" at 56.545,84.112 h1.27; Mechanical 7 "Alt 1 Padstyle: OX60Y90D30P" at 57.497,79.54 h1.27; Mechanical 7 "Alt 2 Padstyle: OX90Y60D30P" at 57.497,78.016 h1.27; Mechanical 7 "0.157in/3.988mm" at 63.689,98.133 h0.64; Mechanical 7 "0.197in/5.004mm" at 71.112,92.9 h0.64; Mechanical 7 "0.05in/1.27mm" at 56.17,94.17 h0.64; Mechanical 7 "0.039in/0.991mm" at 61.085,87.668 h0.64; Mechanical 7 "0.244in/6.198mm" at 63.689,100.038 h0.64; Mechanical 13 "*" at 64.139,94.374 h1.27
U12: Mechanical 7 "Default Padstyle: RX35Y48D0T" at 75.423,71.374 h1.27 r90; Mechanical 7 "Large Padstyle: RX265Y256D0T" at 77.328,71.374 h1.27 r90; Mechanical 7 "Alt 1 Padstyle: OX60Y90D30P" at 79.233,71.691 h1.27 r90; Mechanical 7 "Alt 2 Padstyle: OX90Y60D30P" at 81.138,71.691 h1.27 r90; Mechanical 13 "*" at 72.096,74.93 h1.27 r90
U13: Mechanical 7 "0.022in/0.559mm" at 69.81,66.631 h0.64 r90; Mechanical 7 "0.037in/0.95mm" at 65.08,61.271 h0.64 r90; Mechanical 7 "0.12in/3.048mm" at 65.556,74.155 h0.64 r90; Mechanical 7 "0.118in/2.997mm" at 59.396,67.85 h0.64 r90; Mechanical 7 "0.069in/1.753mm" at 61.301,67.85 h0.64 r90; Mechanical 7 "Alt 2 Padstyle: OX90Y60D30P" at 79.462,61.658 h1.27 r90; Mechanical 7 "Alt 1 Padstyle: OX60Y90D30P" at 77.938,61.658 h1.27 r90; Mechanical 7 "Pin 1 Padstyle: RX46p5Y20D0T" at 73.366,61.341 h1.27 r90; Mechanical 7 "Default Padstyle: RX46p5Y20D0T" at 71.842,60.706 h1.27 r90; Mechanical 13 "*" at 64.872,69.291 h1.27 r90